# EAGLE board LOGICA NAO (EAGLE 9.5.2)
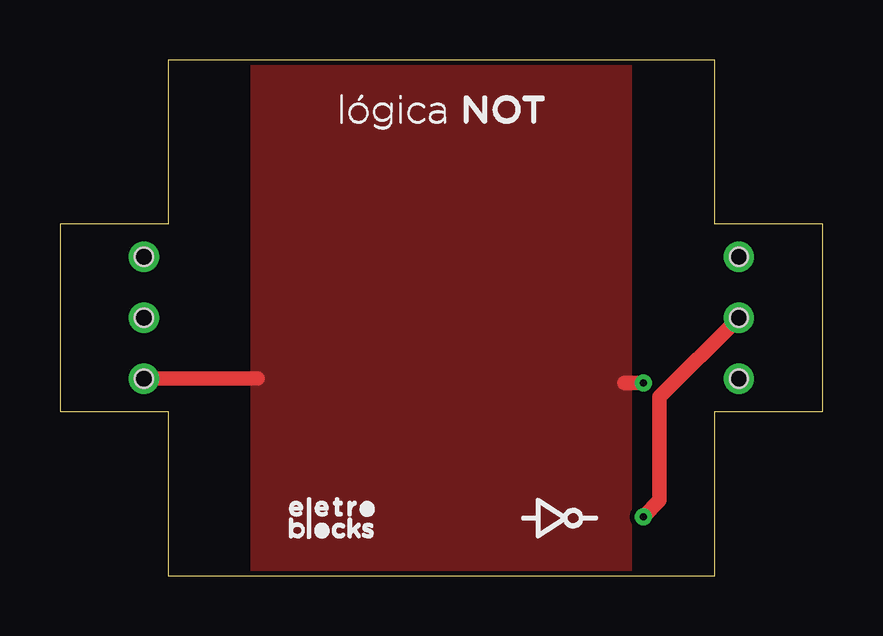
[diagram p0: board, top side]
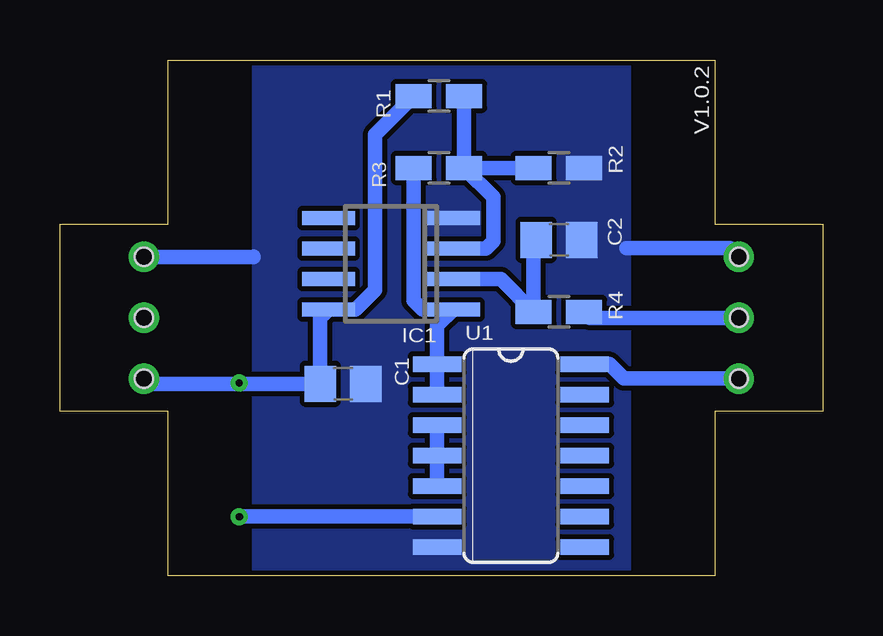
[diagram p1: board, bottom side, seen from below]

Size 31.8 x 21.5 mm. Coordinates in mm from the lower left corner, seen from the top.
Outline: 4.5,0 27.3,0 27.3,6.85 31.8,6.85 31.8,14.65 27.3,14.65 27.3,21.5 4.5,21.5 4.5,14.65 0,14.65 0,6.85 4.5,6.85 4.5,0
Copper layers (1*16): Top 0.035mm / dielectric 1.5mm / Bottom 0.035mm
Design rules "ELETROBLOCKS RULES *": minimum track width 8mil, minimum drill 0.35mm, track to track 8mil, track to pad 8mil, pad to pad 8mil, via to via 8mil, smd to smd 8mil, copper to edge 8mil, drill to drill 8mil, minimum pad ring 10mil, minimum via ring 8mil, stop-mask expansion 4mil, vias tented up to drill 3mm, thermal gap 0mil

## Footprints (pad centres in the part's own frame; a part is rotated, then mirrored left to right if it is on the bottom)
C0805 = smd 1.3 x 1.5: 1 -0.95,0; 2 0.95,0
SO08 = smd 0.6 x 2.2: 1 -1.905,-2.6; 2 -0.635,-2.6; 3 0.635,-2.6; 4 1.905,-2.6; 5 1.905,2.6; 6 0.635,2.6; 7 -0.635,2.6; 8 -1.905,2.6
3CONECTOR = drill 0.75: 1 0,2.54; 2 0,0; 3 0,-2.54 | hole 0.75: 0,2.54; 0,0; 0,-2.54
R0805W = smd 1.5 x 1: 1 -1.052,0; 2 1.052,0
SO14 = smd 0.66 x 2.032: 1 -3.81,-3.073; 2 -2.54,-3.073; 3 -1.27,-3.073; 4 0,-3.073; 5 1.27,-3.073; 6 2.54,-3.073; 7 3.81,-3.073; 8 3.81,3.073; 9 2.54,3.073; 10 1.27,3.073; 11 0,3.073; 12 -1.27,3.073; 13 -2.54,3.073; 14 -3.81,3.073

## Placement (x,y rotation side)
C1  100nF  [C0805]  20,8 0 bottom
C2  100nF  [C0805]  11,14 0 bottom
IC1  LM358D  [SO08]  18,13 90 bottom
J1  CONECTOR_MACHO  [3CONECTOR]  3.5,10.75 0 top
J2  CONECTOR_FEMEA  [3CONECTOR]  28.3,10.75 180 top
R1  2K7  [R0805W]  16,20 0 bottom
R2  510R  [R0805W]  11,17 0 bottom
R3  6K8  [R0805W]  16,17 180 bottom
R4  10K  [R0805W]  11,11 180 bottom
U1  74HC132D  [SO14]  13,5 270 bottom
U$1  [VERSAO]  5.37,21.26 90 top

## Library data of the parts
C1 C2 = rcl; SPICEPREFIX: C
IC1 = linear
J1 J2 U$1 = Eletroblocks Lib
R1-R4 = rcl; SPICEPREFIX: R
U1 = 74xx-eu

## Nets
GND: C1.2 C2.2 IC1.4 J1.1 J2.3 R2.2 U1.7
N$3: C2.1 IC1.2 R4.2
N$4: U1.3 U1.4 U1.5
N$5: IC1.3 R1.2 R2.1 R3.1
SIGNAL_IN: J1.2 R4.1
SIGNAL_OUT: J2.2 U1.6
VALUE: IC1.1 R3.2 U1.1 U1.2
VCC: C1.1 IC1.8 J1.3 J2.1 R1.1 U1.14

## Tracks (layer width: path | path; a pad name or v marks a point on that pad's centre or on a via)
GND
  Bottom 0.61: J2.3 23.73,13.29 23.72,13.3 | J1.1 3.87,13.65 8.18,13.65
  pour Bottom: 8,0 23.8,0 23.8,21.5 8,21.5
N$3
  Bottom 0.61: C2.1 12.05,13.9 R4.2 13.42,12.37 IC1.2
N$4
  Bottom 0.61: U1.3 U1.4 U1.5
N$5
  Bottom 0.61: R2.1 R3.1 | R3.1 13.72,15.78 13.72,13.94 14.03,13.63 IC1.3 | R3.1 R1.2
SIGNAL_IN
  Bottom 0.61: J1.2 9.7,10.75 R4.1
SIGNAL_OUT  (via drill 0.3)
  Top 0.61: J2.2 25,7.45 25,3.13 v24.32,2.45
  Bottom 0.61: U1.6 v24.32,2.46 v24.32,2.45
VALUE
  Bottom 0.61: U1.2 U1.1 16.07,10.42 IC1.1 16.68,11.1 17.05,11.47 R3.2
VCC  (via drill 0.3)
  Top 0.61: J1.3 8.24,8.21 8.25,8.21 | v24.33,8.03 23.55,8.03 23.54,8.04
  Bottom 0.61: J1.3 8.28,8.21 8.89,8.82 9.92,8.82 U1.14 | R1.1 18.67,18.38 18.67,11.91 19.49,11.1 IC1.8 20.95,10.74 C1.1 24.36,8 | J2.1 28.09,8 24.36,8 | 24.36,8 v24.33,8.03
  pour Top: 8,0 8,21.37 8.11,21.48 23.72,21.48 23.79,21.41 23.79,0